# Altium PCB ASIC_Interposer.PcbDoc
Units mm, origin at the board's own origin, x right, y up, seen from the top; angles counter-clockwise.
Board outline 15 x 15 mm, 6 copper layers (Top Layer, Mid Layer 1, Mid Layer 2, Mid Layer 3, Mid Layer 4, Bottom Layer), stack 1.597 mm thick; 14 components, 26 nets, 136 pads, 49 vias.
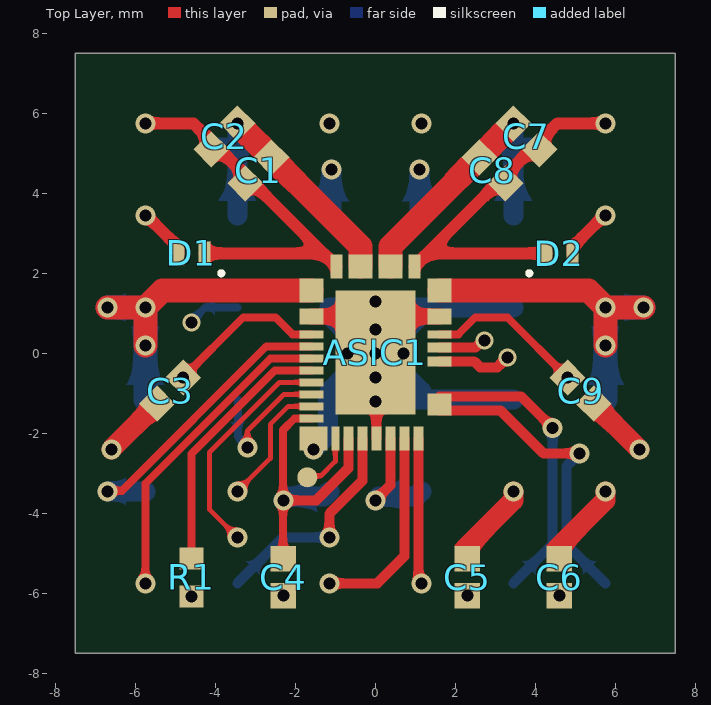
[diagram p0: Top Layer view]
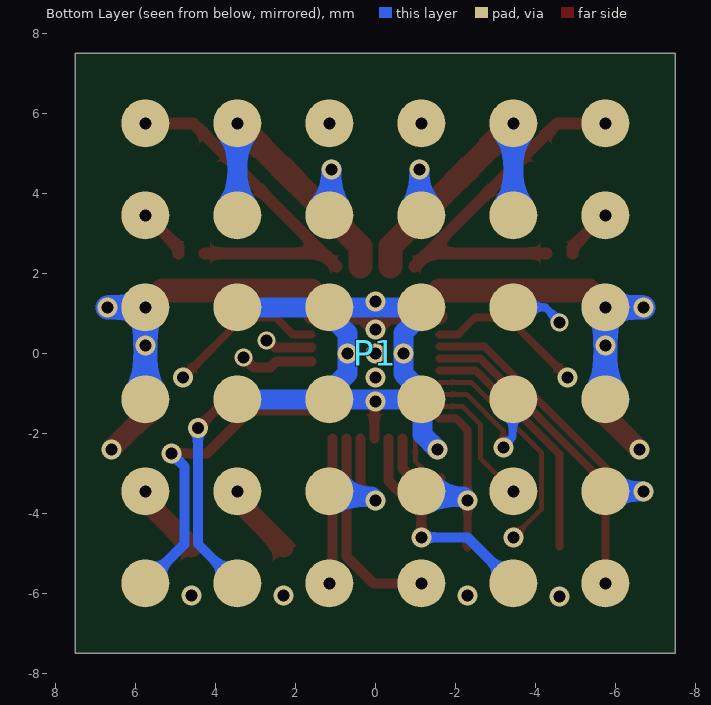
[diagram p1: Bottom Layer view, seen from below]
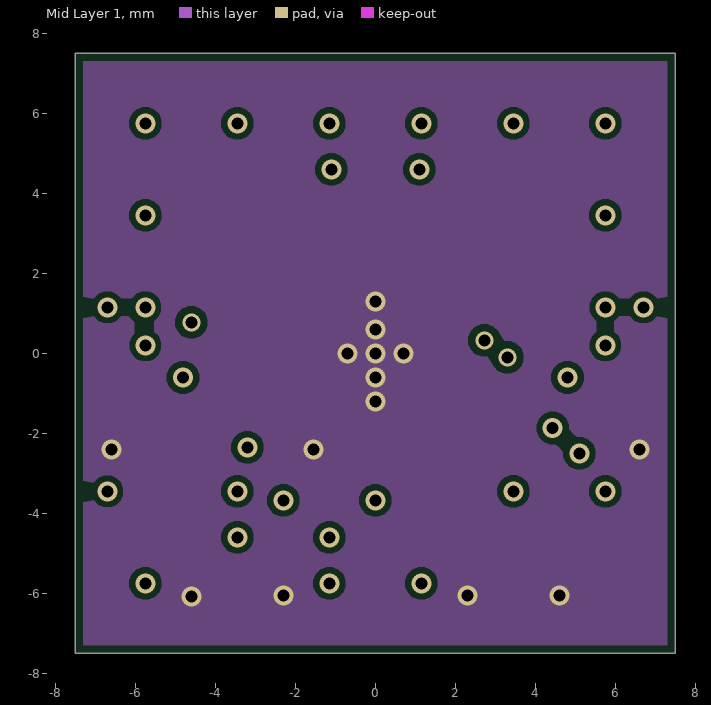
[diagram p2: Mid Layer 1]
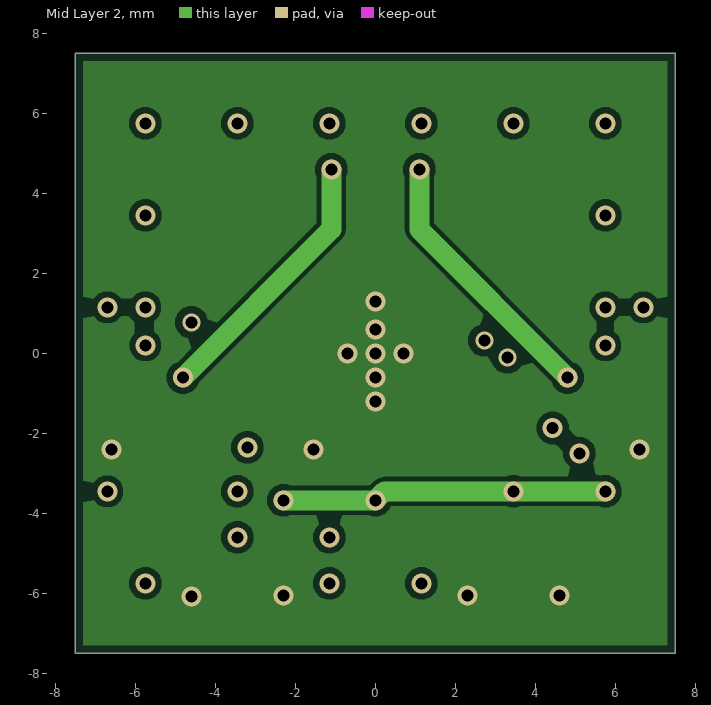
[diagram p3: Mid Layer 2]
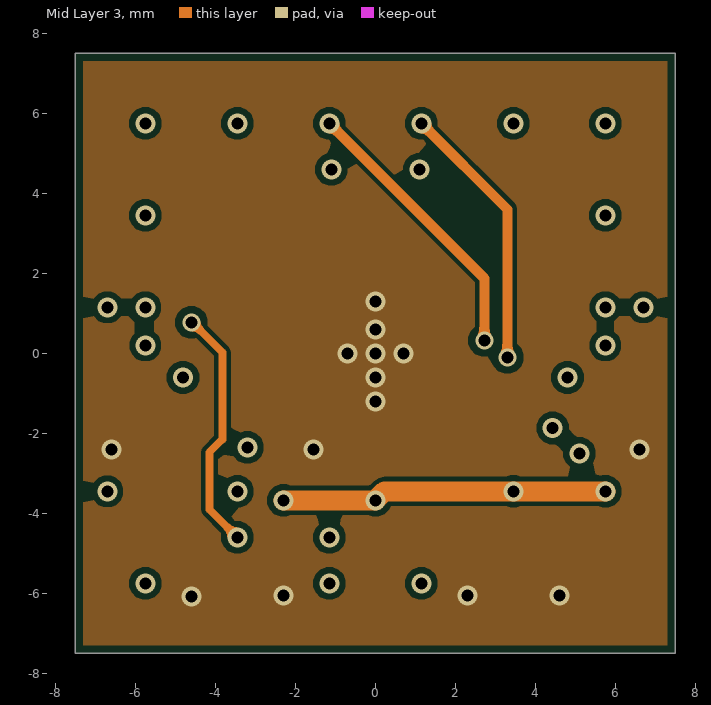
[diagram p4: Mid Layer 3]
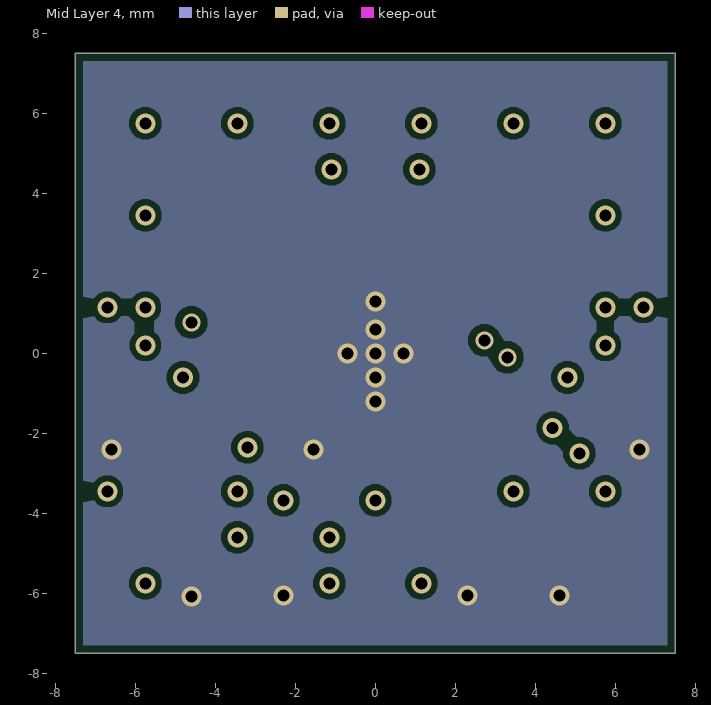
[diagram p5: Mid Layer 4]
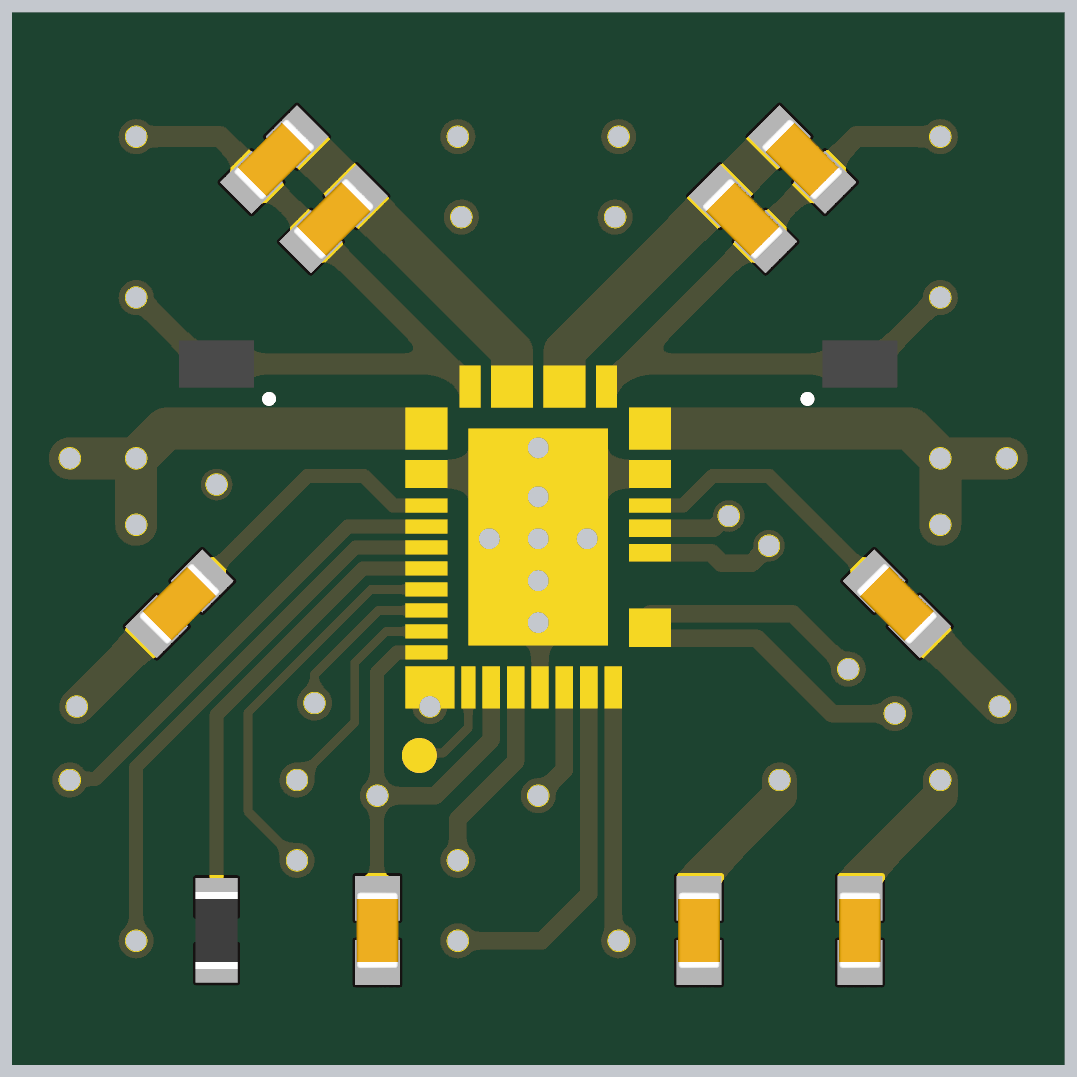
[diagram p6: 3D render of the assembled board from above, using the file's embedded part models]

## Layer stack, top to bottom
Top Solder: solder mask 0.0127, Solder Resist, Dk 3.8
Top Layer: signal copper 0.035
Dielectric 1: prepreg 0.1, 2313, Dk 4.05
Mid Layer 1: signal copper 0.0175
Core 1: core 0.565, FR-4, Dk 4.5
Mid Layer 2: signal copper 0.0175
Dielectric 2: prepreg 0.127, 2116, Dk 4.25
Mid Layer 3: signal copper 0.0175
Core 2: core 0.565, FR-4, Dk 4.5
Mid Layer 4: signal copper 0.0175
Dielectric 3: prepreg 0.1, 2313, Dk 4.05
Bottom Layer: signal copper 0.035
Bottom Solder: solder mask 0.0127, Solder Resist, Dk 3.8

## Board outline
-7.5,-7.5 -7.5,7.5 7.5,7.5 7.5,-7.5

## Design rules (kind name [scope] priority, off if disabled: settings)
BoardOutlineClearance [All] p1: gap=0.2 ignorepadtopadclearanceinfootprint=FALSE
Clearance [All] p1: gap=0.102 ignorepadtopadclearanceinfootprint=FALSE except(0.09: Arc-Arc Arc-Track Arc-SMDPad Track-Track Track-SMDPad SMDPad-SMDPad; 0.127: Via-Fill Via-Poly Via-Region Via-Text; 0.2: Arc-Via Track-Via SMDPad-Via THPad-Via Via-Via; 0.254: Arc-Hole Track-Hole SMDPad-Hole THPad-Hole Via-Hole Fill-Hole Poly-Hole Region-Hole Text-Hole; 0.33: Arc-THPad Track-THPad SMDPad-THPad; 0.5: THPad-THPad)
ComponentClearance [All] p1: gap=0.102 collisioncheckmode=3 verticalgap=0.102 showdistances=TRUE
DiffPairsRouting [All] p1: maxlimit=0.102 minlimit=0.102 mostfreqgap=0.102 toplayer_minwidth=0.102 toplayer_maxwidth=1816.048 toplayer_prefwidth=0.102 midlayer1_minwidth=0.102 midlayer1_maxwidth=1816.048 midlayer1_prefwidth=0.102 midlayer2_minwidth=0.102 midlayer2_maxwidth=1816.048 midlayer2_prefwidth=0.102 midlayer3_minwidth=0.102 midlayer3_maxwidth=1816.048 midlayer3_prefwidth=0.102 midlayer4_minwidth=0.102 midlayer4_maxwidth=1816.048 midlayer4_prefwidth=0.102 bottomlayer_minwidth=0.102 bottomlayer_maxwidth=1816.048 bottomlayer_prefwidth=0.102 maxuncoupledlength=12.7
Height [All] p1: minheight=0 maxheight=1816.048 prefheight=12.7
HoleSize [All] p1: absolutevalues=TRUE maxlimit=6.3 minlimit=0.2 maxpercent=80.000 minpercent=20.000
HoleToHoleClearance HoleToHoleClearance_GND [InNet('GND') vs InNet('GND')] p1: gap=0.254 allowstackedmicrovias=FALSE
HoleToHoleClearance [All] p2: gap=0.5 allowstackedmicrovias=FALSE
MinimumAnnularRing [All] p1: minimumring=0.13
MinimumSolderMaskSliver [All] p1: minsoldermaskwidth=0.13
PlaneClearance [All] p1: clearance=0.102
PlaneConnect PlaneConnectPowerPads [InPadClass('PowerPads')] p1: planeconnectstyle=Direct reliefexpansion=0.508 reliefentries=4 reliefconductorwidth=0.254 reliefairgap=0.254
PlaneConnect [All] p2: planeconnectstyle=Direct reliefexpansion=0.3 reliefentries=4 reliefconductorwidth=0.102 reliefairgap=0.102
PolygonConnect PolygonConnectPowerPads [All vs (InPadClass('PowerPads'))] p1: connectstyle=Direct reliefconductorwidth=0.254 reliefentries=4 polygonreliefangle="90 Angle" airgapwidth=0.254
PolygonConnect [All] p2: connectstyle=Direct reliefconductorwidth=0.102 reliefentries=4 polygonreliefangle="90 Angle" airgapwidth=0.102
RoutingVias [All] p1: holewidth=0.3 width=0.45 viastyle="Through Hole" minholewidth=0.15 minwidth=0.25 maxholewidth=6.3 maxwidth=6.55
SilkToSilkClearance [All] p1: silktosilkclearance=0.15
SilkToSolderMaskClearance [IsPad] p1: minsilkscreentomaskgap=0.15 clearancetoexposedcopper=TRUE
SolderMaskExpansion [All] p1: expansion=0.038 istentingtop=FALSE
Width [All] p1: maxlimit=1816.048 minlimit=0.09 preferedwidth=0.102
20 further rules are at their usual default settings.

## Components (designator, comment, footprint, x,y, rotation, side; value= is the part's Value field where it differs from the comment)
ASIC1 "ASIC_NMR_HB_2020" ASIC_NMR_HB_2020 0,0 r90 top locked
C1 "1u" CAP_0402 -2.925,4.575 r45 top
C2 "1u" CAP_0402 -3.775,5.425 r45 top
C3 "100n" CAP_0402 -5.13,-0.93 r225 top
C4 "100n" CAP_0402 -2.3,-5.6 r270 top
C5 "100n" CAP_0402 2.3,-5.6 r270 top
C6 "100n" CAP_0402 4.6,-5.6 r270 top
C7 "1u" CAP_0402 3.775,5.425 r135 top
C8 "1u" CAP_0402 2.925,4.575 r135 top
C9 "100n" CAP_0402 5.13,-0.93 r315 top
D1 "BAS70LP" DFN65P101X53-2L -4.6,2.5 r180 top
D2 "BAS70LP" DFN65P101X53-2L 4.6,2.5 r0 top
P1 "6 by 6 BGA" "BGA36C230P6X6_1500X1500X190 - ASIC" 0,0 r0 bottom locked
R1 "8k5" RES_0402 -4.6,-5.6 r90 top

## Footprints (in the part's own frame and the unit in brackets; to place one, negate y for a bottom-side part, rotate by r counter-clockwise, add the part's x,y. Pads: shape width x height; smd on the part's side, far side on the other; paste and mask are expansions set on the pad)
ASIC_NMR_HB_2020 [mm]
  rect 0.6x0.2 smd paste-1 mask+0: 1(-2.125,1)
  rect 0.095x0.095 on Mech2 mask+0: 1(-1.075,0.925) 2(-0.925,0.925) 3(-0.775,0.925) 4(-0.625,0.925) 5(-0.475,0.925) 6(-0.325,0.925) 7(-0.175,0.925) 8(-0.025,0.925) 9(0.125,0.925) 10(0.275,0.925) 11(0.475,0.925) 11(0.625,0.925) 11(0.775,0.925) 12(1.025,0.925) 12(1.175,0.925) 12(1.325,0.925) 13(1.45,0.775) 14(1.45,0.125) 14(1.45,0.275) 14(1.45,0.425) 14(1.45,0.575) 15(1.45,-0.575) 15(1.45,-0.425) 15(1.45,-0.275) 15(1.45,-0.125) 16(1.45,-0.775) 17(1.025,-0.925) 17(1.175,-0.925) 17(1.325,-0.925) 18(0.475,-0.925) 18(0.625,-0.925) 18(0.775,-0.925) 19(0.275,-0.925) 20(0.125,-0.925) 21(-0.025,-0.925) 22(-1.425,-0.9) 23(-1.425,-0.75) 24(-1.425,-0.6) 25(-1.425,-0.45) 26(-1.425,-0.3) 27(-1.425,-0.15) 27(-1.425,0) 28(-1.425,0.15) 29(-1.425,0.3) 29(-1.425,0.45)
  rect 0.6x0.7 smd paste-1 mask+0: 2(-2.125,1.55)
  rect 0.2x0.6 smd paste-1 mask+0: 3(-1.625,1.6) 4(-1.325,1.6) 5(-1.025,1.6) 6(-0.725,1.6) 7(-0.425,1.6) 8(-0.125,1.6) 9(0.175,1.6) 10(0.475,1.6) 19(0.475,-1.6)
  rect 0.4x0.6 smd paste-1 mask+0: 11(0.925,1.6) 18(0.925,-1.6) 23(-1.2,-1.6)
  rect 0.6x0.6 smd paste-1 mask+0: 12(1.575,1.6) 14(2.175,0.375) 15(2.175,-0.375) 17(1.575,-1.6)
  rect 0.6x0.3 smd paste-1 mask+0: 13(2.175,0.975) 16(2.175,-0.975)
  rect 0.25x0.6 smd paste-1 mask+0: 20(0.15,-1.6) 21(-0.2,-1.6) 22(-1.425,-1.6)
  rect 0.6x0.25 smd paste-1 mask+0: 24(-2.125,-1.075) 25(-2.125,-0.725) 26(-2.125,-0.375) 27(-2.125,-0.025) 28(-2.125,0.325) 29(-2.125,0.675)
  rect 3.1x2 smd paste-10 mask+0: 30(0.025,0)
"BGA36C230P6X6_1500X1500X190 - ASIC" [mm] "BGA, 36-Leads, Body 15,00x15,00mmx1,90mm, Pitch 2,30mm"
  round 1.2 smd paste-2539.97 mask+0: A1(-5.75,-5.75) A2(-3.45,-5.75) A3(-1.15,-5.75) A4(1.15,-5.75) A5(3.45,-5.75) A6(5.75,-5.75) B1(-5.75,-3.45) B2(-3.45,-3.45) B3(-1.15,-3.45) B4(1.15,-3.45) B5(3.45,-3.45) B6(5.75,-3.45) C1(-5.75,-1.15) C2(-3.45,-1.15) C3(-1.15,-1.15) C4(1.15,-1.15) C5(3.45,-1.15) C6(5.75,-1.15) D1(-5.75,1.15) D2(-3.45,1.15) D3(-1.15,1.15) D4(1.15,1.15) D5(3.45,1.15) D6(5.75,1.15) E1(-5.75,3.45) E2(-3.45,3.45) E3(-1.15,3.45) E4(1.15,3.45) E5(3.45,3.45) E6(5.75,3.45) F1(-5.75,5.75) F2(-3.45,5.75) F3(-1.15,5.75) F4(1.15,5.75) F5(3.45,5.75) F6(5.75,5.75)
CAP_0402 [mm] "Chip Capacitor, 2-Leads, Body 1,00x0,50mm, IPC Medium Density"
  rect 0.64x0.64 smd: 1(-0.46,0) 2(0.46,0)
  body extent -0.55,-0.3 0.55,0.3, height 0.6
DFN65P101X53-2L [mm] "DFN, 2-Leads, Body 0,61x1,01mm, Pitch 0,65mm, IPC High Density"
  rect 0.3x0.6 smd: 1(0.325,0) 2(-0.325,0)
  silkscreen extent -0.8,0.45 -0.7,0.55, body extent -0.54,-0.34 0.54,0.34, height 0.53
RES_0402 [mm] "Chip Resistor, 2-Leads, Body 1,05x0,54mm, IPC Medium Density"
  rect 0.55x0.6 smd: 1(-0.475,0) 2(0.475,0)
  body extent -0.55,-0.3 0.55,0.3, height 0.4

## Part data
C1 C2 C7 C8: library part Cap, "1µ @ 16V max."
C3 C4 C5 C6 C9: library part Cap
D1 D2: library part "Schottky Diode"
P1: library part BGA_6x6
R1: library part Res

## Free pads (board coordinates)
  round 0.5 smd paste-2539.97 mask+0: 1(-1.7,-3.1)

## Via types
v1: diameter 0.5, hole 0.3, Top Layer to Bottom Layer, tented both sides, 26 vias
v2: diameter 0.5, hole 0.3, Top Layer to Bottom Layer, tented top, 12 vias
v3: diameter 0.5, hole 0.3, Top Layer to Bottom Layer, tented bottom, 6 vias
v4: diameter 0.45, hole 0.3, Top Layer to Bottom Layer, tented both sides, 3 vias
v5: diameter 0.5, hole 0.3, Top Layer to Bottom Layer, 2 vias

## Nets (pads, with @x,y where several pads share a name; then routed paths per layer and width w, separated by ;. In a path a pad name is that pad's centre, name@x,y a point inside that pad or via, vN(x,y) a via of type N, cw(c..) or ccw(c..) an arc to the next point about the centre after c; other vN are vias at no path point)
+3.3V_IC: ASIC1.3@-1.6,-1.625 ASIC1.26@0.375,-2.125 ASIC1.29@-0.675,-2.125 C4.1 C5.1 C6.1 P1.E3 P1.E4 P1.E5 P1.E6 | length 30.7
  Top Layer w0.2: C4.1@-2.3,-4.85 -2.307,-4.843 -2.307,-3.675 -2.307,-1.918 -2.015,-1.625 ASIC1.3@-1.6,-1.625
  Top Layer w0.25: v1(-2.3,-3.675) -1.475,-3.675 -0.675,-2.875 ASIC1.29@-0.675,-2.125 ; v1(0,-3.675) 0.375,-3.3 ASIC1.26@0.375,-2.125
  Top Layer w0.5: C5.1@2.3,-4.85 2.3,-4.825 3.45,-3.675 v2(3.45,-3.45) ; C6.1@4.6,-4.85 4.6,-4.825 5.75,-3.675 v2(5.75,-3.45)
  Mid Layer 2 w0.5: v1(-2.3,-3.675) v1(0,-3.675) 0.225,-3.45 v2(3.45,-3.45) v2(5.75,-3.45)
  Mid Layer 3 w0.5: v1(-2.3,-3.675) v1(0,-3.675) 0.225,-3.45 v2(3.45,-3.45) v2(5.75,-3.45)
  Bottom Layer w0.5: v1(-2.3,-3.675) -2.209,-3.584 -1.284,-3.584 P1.E3 ; v1(0,-3.675) 0.091,-3.584 1.016,-3.584 P1.E4
FREF: ASIC1.28@-0.325,-2.125 P1.F2 | length 5.6
  Top Layer w0.25: v1(-1.15,-4.6) -1.15,-4.012 -0.325,-3.187 ASIC1.28@-0.325,-2.125
  Bottom Layer w0.25: P1.F2 -2.3,-4.6 v1(-1.15,-4.6)
GND: ASIC1.2@-1.55,-2.125 ASIC1.11@-1.6,0.925 ASIC1.18@1.6,0.925 ASIC1.27@0.025,-2.125 ASIC1.30 C3.2 C4.2 C5.2 C6.2 C9.2 P1.C3 P1.C4 P1.C5 P1.D3 P1.D4 P1.D5 R1.1 | length 23
  Top Layer w0.25: v1(0,-1.2) 0.025,-1.225 ASIC1.27@0.025,-2.125
  Top Layer w0.4: ASIC1.11@-1.6,0.925 -0.325,0.925 v1(0,0.6) 0.325,0.925 ASIC1.18@1.6,0.925
  Top Layer w0.5: v1(-6.6,-2.4) C3.2@-5.661,-1.461 ; C9.2@5.661,-1.461 v1(6.6,-2.4)
  Bottom Layer w0.5: v1(-1.55,-2.4) -1.18,-2.03 -1.18,-1.18 P1.D3 ; P1.D5 P1.D4 ; P1.C5 P1.C4 ; P1.D3 0,-1.15 P1.D4 ; P1.D3 -1.15,-0.961 -0.7,-0.511 -0.7,0.511 -1.15,0.961 P1.C3 0,1.15 P1.C4 ; P1.D4 1.15,-0.961 0.7,-0.511 0.7,0.511 1.15,0.961 P1.C4
  other v1: 0,-0.6 -0.7,0 0,0 0.7,0 0,1.3
  other v3: -4.6,-6.085 -2.3,-6.06 2.3,-6.06 4.6,-6.06
I_N: ASIC1.24@1.075,-2.125 P1.F4 | length 3.7
  Top Layer w0.25: ASIC1.24@1.075,-2.125 1.075,-5.607 1.15,-5.682 v1(1.15,-5.75)
I_P: ASIC1.25@0.725,-2.125 P1.F3 | length 5.1
  Top Layer w0.25: v1(-1.15,-5.75) 0.05,-5.75 0.725,-5.075 ASIC1.25@0.725,-2.125
LNA_N: ASIC1.21@1.6,-0.2 P1.A4 | length 8.6
  Top Layer w0.25: ASIC1.21@1.6,-0.2 2.472,-0.2 2.622,-0.35 3.05,-0.35 v4(3.3,-0.1)
  Mid Layer 3 w0.25: v2(1.15,5.75) 3.304,3.596 3.304,-0.096 v4(3.3,-0.1)
LNA_P: ASIC1.20@1.6,0.15 P1.A3 | length 8.2
  Top Layer w0.25: ASIC1.20@1.6,0.15 2.509,0.15 2.684,0.325 v4(2.725,0.325)
  Mid Layer 3 w0.25: v2(-1.15,5.75) 2.725,1.875 v4(2.725,0.325)
NetASIC1_7: ASIC1.7@-1.6,-0.425 R1.2 | length 6.2
  Top Layer w0.2: -4.6,-4.825 -4.6,-2.52 -2.505,-0.425 ASIC1.7@-1.6,-0.425
Q_N: ASIC1.22@1.6,-1.425 P1.F6 | length 7.7
  Top Layer w0.25: ASIC1.22@1.6,-1.425 3.125,-1.425 4.2,-2.5 v1(5.1,-2.5)
  Bottom Layer w0.25: v1(5.1,-2.5) 4.775,-2.825 4.775,-4.775 P1.F6
Q_P: ASIC1.23@1.6,-1.2 P1.F5 | length 7.5
  Top Layer w0.25: ASIC1.23@1.6,-1.075 3.644,-1.075 v1(4.435,-1.865)
  Bottom Layer w0.25: P1.F5 4.435,-4.765 v1(4.435,-1.865)
RX: ASIC1.8@-1.6,-0.125 P1.F1 | length 7.9
  Top Layer w0.2: v2(-5.75,-5.75) -5.75,-3.26 -2.615,-0.125 ASIC1.8@-1.6,-0.125
SPI_CLK_3V: ASIC1.5@-1.6,-1.025 P1.D2 | length 3.7
  Top Layer w0.125: v1(-3.2,-2.35) -3.2,-1.94 -2.285,-1.025 ASIC1.5@-1.6,-1.025
  Bottom Layer w0.2: P1.D2 -3.435,-1.165 -3.435,-2.083 -3.2,-2.318 v1(-3.2,-2.35)
SPI_CS_3V: ASIC1.4@-1.6,-1.325 P1.E2 | length 3.2
  Top Layer w0.125: v2(-3.45,-3.45) -2.625,-2.625 -2.625,-1.775 -2.175,-1.325 ASIC1.4@-1.6,-1.325
SPI_DATA_ASIC_OUT: ASIC1.1@-1,-2.125 pad.1 | length 1.4
  Top Layer w0.125: pad.1 -1.666,-3.066 -1.366,-3.066 -1,-2.7 ASIC1.1@-1,-2.125
SPI_DATA_IN_3V: ASIC1.6@-1.6,-0.725 P1.C2 | length 13.1
  Top Layer w0.125: v1(-3.45,-4.6) -4.15,-3.9 -4.15,-2.48 -2.395,-0.725 ASIC1.6@-1.6,-0.725
  Mid Layer 3 w0.2: v4(-4.6,0.775) -4.575,0.775 -3.825,0.025 -3.825,-2.15 -4.15,-2.475 -4.15,-3.9 v1(-3.45,-4.6)
  Bottom Layer w0.2: v4(-4.6,0.775) -4.6,0.8 -4.25,1.15 P1.C2
TX: ASIC1.9@-1.6,0.175 P1.E1 | length 7.6
  Top Layer w0.2: v1(-6.7,-3.45) -6.686,-3.436 -6.336,-3.436 -2.725,0.175 ASIC1.9@-1.6,0.175
  Bottom Layer w0.5: v1(-6.7,-3.45) P1.E1
TX_OUT_N: ASIC1.15@0.375,2.175 C7.2 C8.2 P1.A5 P1.B5 | length 7.1
  Top Layer w0.6: ASIC1.15@0.375,2.175 0.375,2.675 2.45,4.75 2.65,4.95 v5(3.45,5.75)
  Bottom Layer w0.5: P1.B5 v5(3.45,5.75)
TX_OUT_P: ASIC1.14@-0.375,2.175 C1.2 C2.2 P1.A2 P1.B2 | length 7.1
  Top Layer w0.6: v5(-3.45,5.75) -2.65,4.95 -2.45,4.75 -0.375,2.675 ASIC1.14@-0.375,2.175
  Bottom Layer w0.5: P1.B2 v5(-3.45,5.75)
V_HB_N: ASIC1.17@1.6,1.575 P1.C6 P1.D6 | length 9.5
  Top Layer w0.6: ASIC1.17@1.6,1.575 5.325,1.575 v2(5.75,1.15) ; v1(5.75,0.2) v2(5.75,1.15) ; v1(6.7,1.15) v2(5.75,1.15)
  Bottom Layer w0.6: P1.D6 v1(5.75,0.2) v2(5.75,1.15) v1(6.7,1.15)
V_HB_P: ASIC1.12@-1.6,1.575 P1.C1 P1.D1 | length 9.5
  Top Layer w0.6: v1(-6.7,1.15) v2(-5.75,1.15) ; v1(-5.75,0.2) v2(-5.75,1.15) ; ASIC1.12@-1.6,1.575 -5.325,1.575 v2(-5.75,1.15)
  Bottom Layer w0.6: v1(-6.7,1.15) v2(-5.75,1.15) v1(-5.75,0.2) P1.D1
VDD_HS_extdiode_N: ASIC1.16@0.975,2.175 C7.1 C8.1 D2.2 P1.A6 | length 9.2
  Top Layer w0.3: ASIC1.16@0.975,2.175 1.3,2.5 ; D2.2 1.3,2.5 ; v2(5.75,5.75) 4.55,5.75 1.3,2.5
VDD_HS_extdiode_P: ASIC1.13@-0.975,2.175 C1.1 C2.1 D1.2 P1.A1 | length 9.2
  Top Layer w0.3: v2(-5.75,5.75) -4.55,5.75 -1.3,2.5 ; D1.2 -1.3,2.5 ; ASIC1.13@-0.975,2.175 -1.3,2.5
VDD_HS_N: D2.1 P1.B6 | length 1.3
  Top Layer w0.3: D2.1 4.925,2.65 5.725,3.45 v2(5.75,3.45)
VDD_HS_P: D1.1 P1.B1 | length 1.3
  Top Layer w0.3: v2(-5.75,3.45) -5.725,3.45 -4.925,2.65 D1.1
VDD_LS_N: ASIC1.19@1.6,0.475 C9.1 P1.B4 | length 11.9
  Top Layer w0.2: ASIC1.19@1.6,0.475 2.074,0.475 2.499,0.9 3.3,0.9 v3(4.805,-0.605)
  Mid Layer 2 w0.5: v1(1.1,4.6) 1.1,3.1 v3(4.805,-0.605)
  Bottom Layer w0.5: v1(1.1,4.6) 1.1,3.5 P1.B4
VDD_LS_P: ASIC1.10@-1.6,0.475 C3.1 P1.B3 | length 12
  Top Layer w0.2: v3(-4.805,-0.605) -3.3,0.9 -2.499,0.9 -2.074,0.475 ASIC1.10@-1.6,0.475
  Mid Layer 2 w0.5: v3(-4.805,-0.605) -1.1,3.1 v1(-1.1,4.6)
  Bottom Layer w0.25: v1@-1.125,4.575 v1(-1.1,4.6)
  Bottom Layer w0.5: P1.B3 -1.1,3.5 v1(-1.1,4.6)
pads on no net: ASIC1.1@-0.925,-1.075 ASIC1.2@-0.925,-0.925 ASIC1.3@-0.925,-0.775 ASIC1.4@-0.925,-0.625 ASIC1.5@-0.925,-0.475 ASIC1.6@-0.925,-0.325 ASIC1.7@-0.925,-0.175 ASIC1.8@-0.925,-0.025 ASIC1.9@-0.925,0.125 ASIC1.10@-0.925,0.275 ASIC1.11@-0.925,0.475 ASIC1.11@-0.925,0.625 ASIC1.11@-0.925,0.775 ASIC1.12@-0.925,1.025 ASIC1.12@-0.925,1.175 ASIC1.12@-0.925,1.325 ASIC1.13@-0.775,1.45 ASIC1.14@-0.125,1.45 ASIC1.14@-0.275,1.45 ASIC1.14@-0.425,1.45 ASIC1.14@-0.575,1.45 ASIC1.15@0.125,1.45 ASIC1.15@0.275,1.45 ASIC1.15@0.425,1.45 ASIC1.15@0.575,1.45 ASIC1.16@0.775,1.45 ASIC1.17@0.925,1.025 ASIC1.17@0.925,1.175 ASIC1.17@0.925,1.325 ASIC1.18@0.925,0.475 ASIC1.18@0.925,0.625 ASIC1.18@0.925,0.775 ASIC1.19@0.925,0.275 ASIC1.20@0.925,0.125 ASIC1.21@0.925,-0.025 ASIC1.22@0.9,-1.425 ASIC1.23@0.75,-1.425 ASIC1.24@0.6,-1.425 ASIC1.25@0.45,-1.425 ASIC1.26@0.3,-1.425 ASIC1.27@0,-1.425 ASIC1.27@0.15,-1.425 ASIC1.28@-0.15,-1.425 ASIC1.29@-0.3,-1.425 ASIC1.29@-0.45,-1.425

## Polygon pours and split planes (outlines as drawn)
GND on Mid Layer 2 "NONET_L-01_P-001" (solid, remove dead copper, pour order 3): -10,10 10,10 10,-10 -10,-10
GND on Mid Layer 4 "NONET_L-01_P-001" (solid, remove dead copper, pour order 1): -10,10 10,10 10,-10 -10,-10
GND on Mid Layer 1 "NONET_L-01_P-001" (solid, remove dead copper, pour order 0): -10,10 10,10 10,-10 -10,-10
GND on Mid Layer 3 "NONET_L-01_P-001" (solid, remove dead copper, pour order 2): -10,10 10,10 10,-10 -10,-10

## Silkscreen, mask and mechanical layers (free items; w line width, h text height)
Outline:
  the board outline again, w0.01